# EAGLE board project-nixie-v1 (EAGLE 7.6.0)
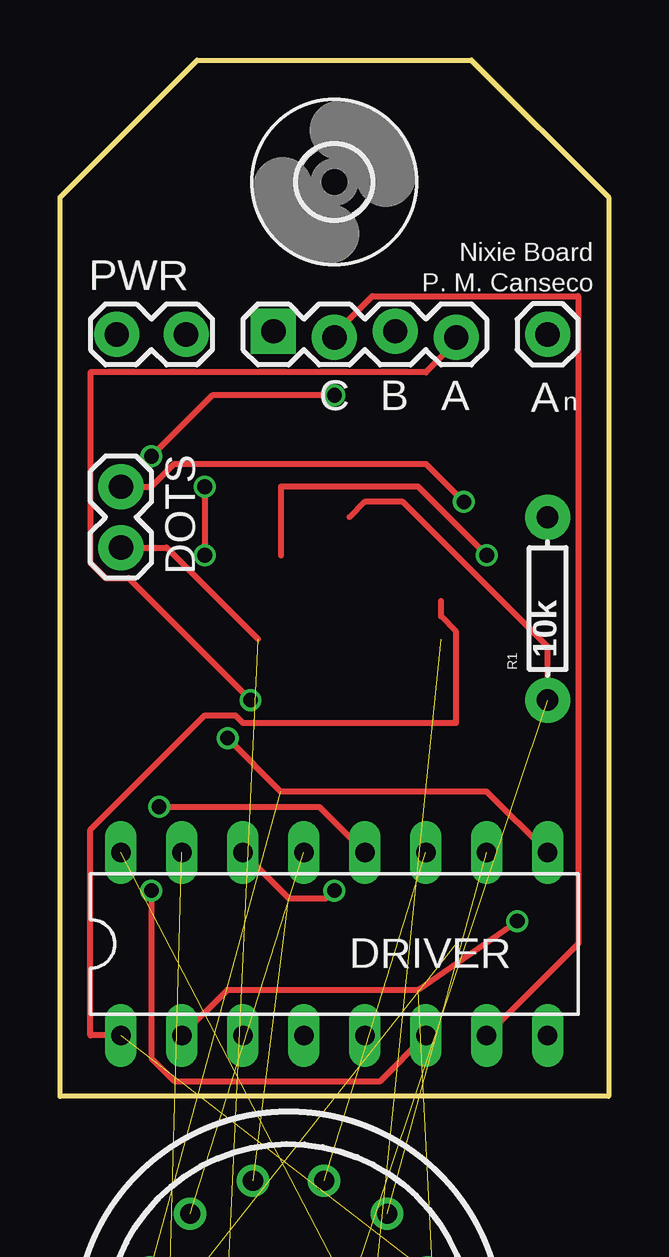
[diagram p0: board, top side]
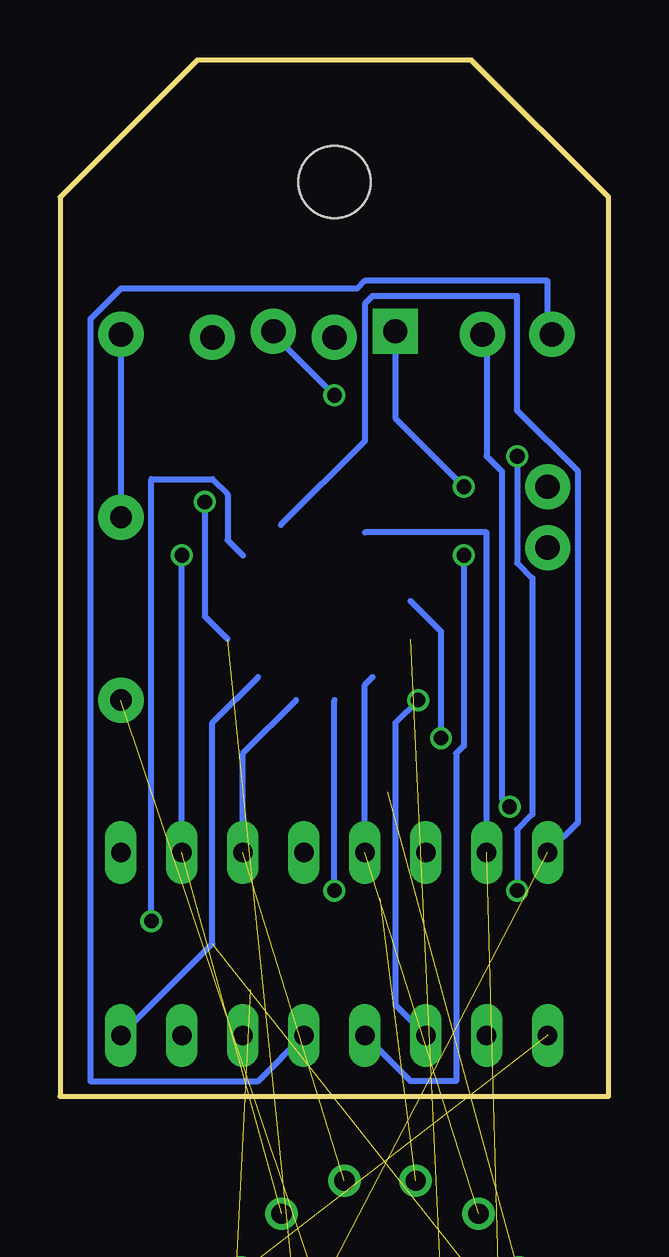
[diagram p1: board, bottom side, seen from below]

Size 22.86 x 43.18 mm. Coordinates in mm from the lower left corner, seen from the top.
Outline: 0,0 0,37.46 5.71,43.18 17.15,43.18 22.86,37.46 22.86,0 0,0
Copper layers (1*16): Top 0.035mm / dielectric 1.5mm / Bottom 0.035mm
Design rules "SeeedStudio_2layer_DRU_no_angle_20140221": minimum track width 6mil, minimum drill 12mil, track to track 6mil, track to pad 6mil, pad to pad 6mil, via to via 6mil, smd to smd 0mil, copper to edge 10mil, drill to drill 10mil, minimum pad ring 10mil, minimum via ring 6mil, stop-mask expansion 2mil, vias tented up to drill 100mil, thermal gap 10mil

## Footprints (pad centres in the part's own frame; a part is rotated, then mirrored left to right if it is on the bottom)
1X01 = drill 1.016 pad 1.88: 1 0,0
1X02 = drill 1.016 pad 1.88: 1 0,0; 2 2.54,0
DIL16 = drill 0.813 long: 1 -8.89,-3.81; 2 -6.35,-3.81; 3 -3.81,-3.81; 4 -1.27,-3.81; 5 1.27,-3.81; 6 3.81,-3.81; 7 6.35,-3.81; 8 8.89,-3.81; 9 8.89,3.81; 10 6.35,3.81; 11 3.81,3.81; 12 1.27,3.81; 13 -1.27,3.81; 14 -3.81,3.81; 15 -6.35,3.81; 16 -8.89,3.81
1X04_LOCK = drill 1.016 pad 1.88 square: 1 0,0.127 | drill 1.016 pad 1.88: 2 2.54,-0.127; 3 5.08,0.127; 4 7.62,-0.127
IN-14 = drill 0.84: 0 5.094,-3.516; 1 -5.094,-3.516; 2 -6.145,-0.746; 3 -5.788,2.195; 4 -4.105,4.633; 5 -1.481,6.01; 6 1.481,6.01; 7 4.105,4.633; 8 5.788,2.195; 9 6.145,-0.746; A 0,-6.19; LHDP 2.877,-5.481; RHDP -2.877,-5.481
1X02_LOCK = drill 1.016 pad 1.88: 1 -0.178,0; 2 2.718,0
AXIAL-0.3 = drill 0.9 pad 1.88: P$1 -3.81,0; P$2 3.81,0
3,0 = hole 3: 0,0

## Placement (x,y rotation side)
A  [1X01]  20.32,31.75 0 top
DOTS  [1X02]  2.54,25.4 270 top
DRIVER  74141N  [DIL16]  11.43,6.35 0 top
J1  D  [1X04_LOCK]  8.89,31.75 0 top
NX  IN-14  [IN-14]  9.53,-9.53 0 top  (outside the outline)
PWR  5V  [1X02_LOCK]  2.54,31.75 0 top
R1  10k  [AXIAL-0.3]  20.32,20.32 90 top
U$1  [3,0]  11.43,38.1 0 top

## Library data of the parts
A DOTS PWR = SparkFun-Connectors
DRIVER = 74xx-us
J1 = SparkFun-Connectors; PROD_ID: CONN-09696
NX = russian-nixies
R1 = SparkFun-Passives
U$1 = holes

## Nets
5V: DRIVER.5 PWR.1
A: DRIVER.3 J1.4
B: DRIVER.6 J1.3
C: DRIVER.7 J1.2
D: DRIVER.4 J1.1
GND: DRIVER.12 PWR.2
LHDP: DOTS.1 NX.LHDP
N$1: DRIVER.2 NX.9
N$2: DRIVER.1 NX.8
N$3: DRIVER.10 NX.7
N$4: DRIVER.11 NX.6
N$5: DRIVER.14 NX.5
N$6: DRIVER.13 NX.4
N$7: DRIVER.9 NX.3
N$8: DRIVER.8 NX.2
N$9: DRIVER.15 NX.1
N$10: DRIVER.16 NX.0
N$11: NX.A R1.P$1
N$12: A.1 R1.P$2
RHDP: DOTS.2 NX.RHDP

## Tracks (layer width: path | path; a pad name or v marks a point on that pad's centre or on a via)
5V
  Bottom 0.254: DRIVER.5 14.61,0.64 21.59,0.64 21.59,32.38 20.32,33.66 10.48,33.66 10.16,33.97 2.54,33.97 2.54,31.75 PWR.1
A  (via drill 0.61)
  Top 0.254: v7.94,16.51 2.86,21.59 1.91,21.59 1.27,22.23 1.27,30.16 15.24,30.16 16.51,31.43 J1.4
  Bottom 0.254: DRIVER.3 8.89,3.81 8.89,15.56 v7.94,16.51
B  (via drill 0.61)
  Top 0.254: DRIVER.6 13.33,0.64 4.76,0.64 3.81,1.59 v3.81,8.57 | v3.81,26.67 6.35,29.21 v11.43,29.21
  Bottom 0.254: v3.81,8.57 3.81,11.11 3.17,11.75 3.17,21.59 3.81,22.23 v3.81,26.67 | v11.43,29.21 13.97,31.75 J1.3
C
  Top 0.254: DRIVER.7 21.59,6.35 21.59,33.34 13.02,33.34 11.43,31.75 J1.2
D  (via drill 0.61)
  Top 0.254: v6.03,25.4 v6.03,22.54
  Bottom 0.254: DRIVER.4 8.26,0.64 6.35,0.64 6.35,14.29 6.03,14.61 v6.03,22.54 | v6.03,25.4 8.89,28.26 J1.1
GND  (via drill 0.61)
  Top 0.254: DRIVER.12 10.79,12.06 v4.13,12.06
  Bottom 0.254: v4.13,12.06 4.45,12.38 4.45,26.04 5.08,26.67 5.08,31.75 PWR.2
LHDP  (via drill 0.61)  (1 unrouted)
  Top 0.254: v16.83,24.77 15.24,26.35 4.76,26.35 3.81,25.4 DOTS.1
  Bottom 0.254: 15.88,19.05 16.83,20 v16.83,24.77
N$1  (via drill 0.61)  (1 unrouted)
  Top 0.254: v19.05,7.3 14.92,4.45 6.98,4.45 DRIVER.2
  Bottom 0.254: 15.24,22.54 15.88,23.18 15.88,25.08 16.51,25.72 19.05,25.72 v19.05,7.3
N$2  (1 unrouted)
  Top 0.254: 15.88,20.64 15.88,20 16.51,19.37 16.51,15.56 7.62,15.56 7.3,15.88 6.03,15.88 1.27,11.11 1.27,2.54 DRIVER.1
N$3  (via drill 0.61)  (1 unrouted)
  Top 0.254: 9.21,22.54 9.21,25.4 14.92,25.4 v17.78,22.54
  Bottom 0.254: DRIVER.10 v17.78,22.54
N$4  (1 unrouted)
  Bottom 0.254: 13.02,16.51 15.24,14.29 DRIVER.11
N$5  (via drill 0.61)  (1 unrouted)
  Top 0.254: v11.43,8.57 11.11,8.26 9.53,8.26 DRIVER.14
  Bottom 0.254: v11.43,8.57 11.43,16.51
N$6  (1 unrouted)
  Bottom 0.254: 9.84,17.46 10.16,17.15 DRIVER.13
N$7  (via drill 0.61)  (1 unrouted)
  Top 0.254: v6.98,14.92 9.21,12.7 17.78,12.7 DRIVER.9
  Bottom 0.254: 8.26,20.64 6.98,19.37 v6.98,14.92
N$8  (1 unrouted)
  Bottom 0.254: 14.61,17.46 16.51,15.56 16.51,6.35 DRIVER.8
N$9  (1 unrouted)
  Bottom 0.254: 10.16,23.5 5.08,23.5 DRIVER.15
N$10  (1 unrouted)
  Bottom 0.254: 13.65,23.81 10.16,27.31 10.16,33.02 9.84,33.34 3.81,33.34 3.81,28.58 1.27,26.04 1.27,11.43 DRIVER.16
N$11  (1 unrouted)
  Top 0.254: 12.06,24.13 12.7,24.77 14.29,24.77 20.32,18.73 R1.P$1
N$12
  Bottom 0.254: A.1 R1.P$2
RHDP  (1 unrouted)
  Top 0.254: 8.26,19.05 4.45,22.86 DOTS.2

## Text on the board
tPlace: Nixie Board | P. M. Canseco | C | B | A | n